# Altium PCB Pico_Main_Board.PcbDoc (part 2 of 2)
Units mil, origin at the board's own origin, x right, y up, seen from the top; angles counter-clockwise.
Board outline 4000 x 3000 mil, 2 copper layers (Top Layer, Bottom Layer); 8 components, 40 nets, 107 pads, 39 vias.
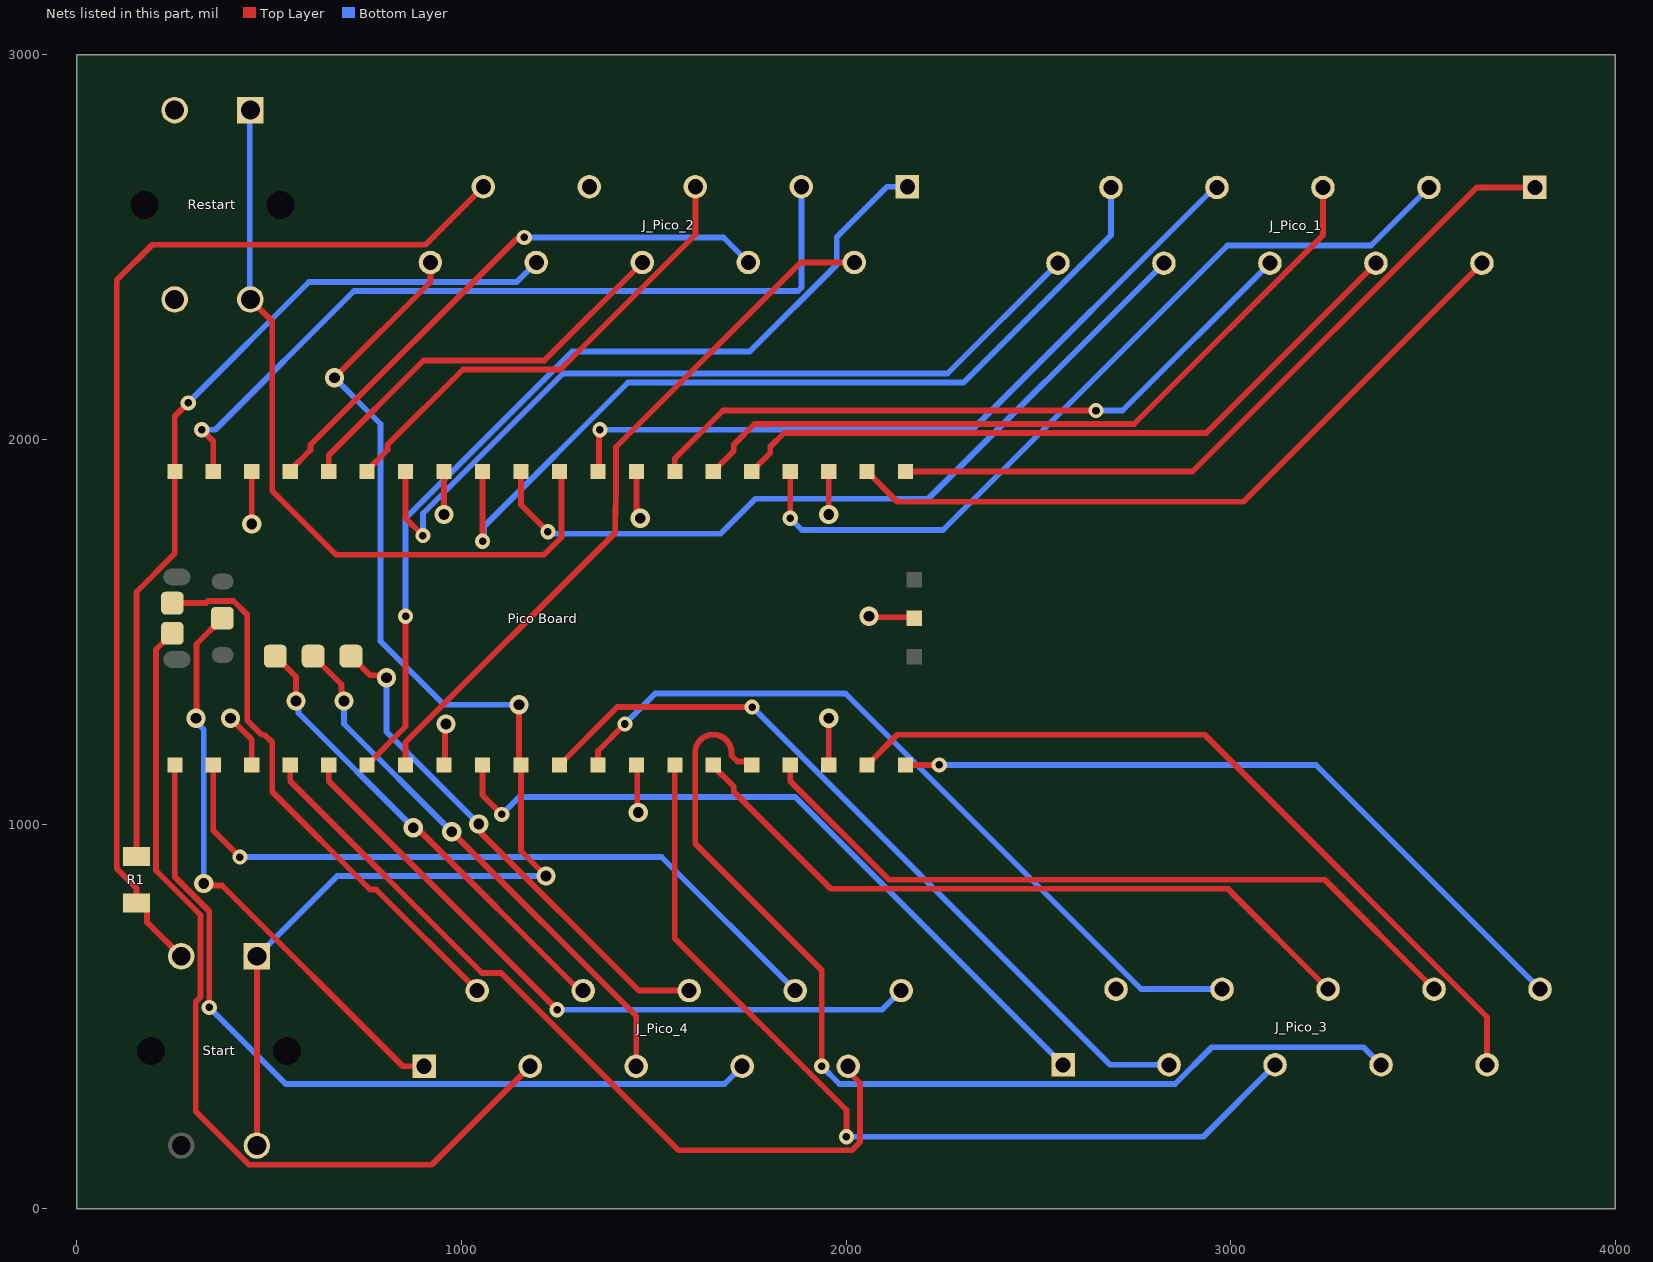
[diagram p2: the nets of this part, all layers, seen from the top]

## Part data
J_Pico_1 J_Pico_2 J_Pico_3 J_Pico_4: library part CMP-00298-00128517-1, "1985276 Barrier Strip Terminal Block, 2A, 1.5mm2, 1 Row(s), 1 Deck(s)", Ambient Temperature Range High=100°C, Color=Green, Current=2A, Flammability Rating="UL94 V-0", Max Supply Voltage=250V, Min Operating Temperature=-40°C, Voltage=300V, Approvals="UL, VDE", Contact Material=Tin, Contact Plating=Tin, Current Rating=2A, Depth=12mm, Height=13.1mm, Housing Color=Green, Housing Material=Polyamide, Insulation Material=Nylon, Lead Free="Lead Free", Length=12mm, Material=Nylon, Max Current Rating=2A, Max Operating Temperature=100°C, Mount="Through Hole", NexarPartId=128517, Number of Circuits=10, Number of Contacts=10, Number of Levels=1, Number of Pins=10, Number of Poles=10, Number of Positions=10, Number of Positions Per Level=10, Number of Rows=1, Packaging=Bulk, Pitch=3.5mm, Radiation Hardening=No, RoHS=Compliant, Stripping Length=8mm, Termination=Solder, Voltage Rating=250V, Weight=4.93001g, Width=36.5mm, Wire Gauge (Max)=20AWG, Wire Gauge (Min)=20AWG, Wire/Cable Gauge=16AWG
"Pico Board": "RP2040 Raspberry Pi Pico series ARMÂ® CortexÂ®-M0+ MCU 32-Bit Embedded Evaluation Board", Package=None, Availability="In Stock", Check_prices=https://www.snapeda.com/parts/SC0915/Raspberry+Pi/view-part/?ref=eda, MF="Raspberry Pi", MP=SC0915, Price=None, Purchase-URL=https://pricing.snapeda.com/search/part/SC0915/?ref=eda, SnapEDA_Link=https://www.snapeda.com/parts/SC0915/Raspberry+Pi/view-part/?ref=snap
R1: library part CMP-1014-00623-2, "Chip Resistor, 10 KOhm, +/- 1%, 0.25 W, -55 to 155 degC, 1206 (3216 Metric), RoHS, Tape and Reel", Case Code (Imperial)=1206, Case Code (Metric)=3216, Manufacturer=Yageo, Max Operating Temperature=155degC, Min Operating Temperature=-55degC, Package Description="2-Pin Surface Mount Device, Body 3.1 x 1.6 mm", Package Quantity=5000, Package Reference=1206.0, Power Rating=250mW, Resistance=10KOhm, Temperature Coefficient=100ppm/degreesC, Tolerance=1%, Voltage Rating=200V, Case/Package=1206, Composition=ThickFilm, Datasheet URL=http://www.yageo.com/NewPortal/yageodocoutput?fileName=/pdf/R-Chip/PYu-RC_Group_51_RoHS_L_5.pdf, Datasheet Version="Rev. 5, 10/2016", Depth=1.6mm, Height=0.55mm, Lead Free=LeadFree, Length=3.1mm, Manufacturer URL=http://www.yageo.com/, Military Standard=Not, Packaging=TapeandReel, REACH SVHC=Unknown, RoHSCompliant=true, Termination=SMD/SMT, Width=1.6mm
Restart Start: library part CMP-2000-05902-1, "Tactile Switch, 1 to 50 mA, 100 mOhm Max, 5 to 24 VDC, -25 to 70 degC, 4-Pin THD, RoHS, Bulk", Actuator Color=Orange, Contact Rating @ Voltage=0.05@24VDCA, Dielectric Strength=500VAC, Manufacturer=OmronElectronics, Maximum AC Voltage Rating=N/A, Maximum Contact Resistance=100mOhm, Maximum DC Voltage Rating=24V, Minimum Insulation Resistance=100MOhm, Operating Force=2.55N, Operating Temperature=-25to70C, Package Description="4-Pin Through Hole Device, Body 12 x 12 mm", Actuator Length=3mm, Actuator Style=ProjectedPlunger, Base Material=N/A, Body Orientation=Straight, Contact Material=N/A, Contact Plating=Gold, Datasheet URL=https://datasheet.ciiva.com/20148/78-0136-20148640.pdf, Datasheet Version=06/2009, Dimension=12x12x7.3mm, Electrical Life=1000000Cycles, Family=B3F, Ground Terminal=No, Housing Material=N/A, Illumination Type=N/R, Manufacturer URL=http://www.omron.com/, Mechanical Life=N/A, Mounting=ThroughHole,PCPins, Mounting Technology=ThroughHole, Package Reference=B3F-4055, Packaging=Bag, Part No=B3F-4055, Pole Throw Configuration=SPST, Product Weight=0.85g, RoHS=Yes, Seal Description=N/A, Seal Location=N/A, Switch Configuration=N.O., Type=Miniature

## Via types
v1: diameter 50, hole 28, Top Layer to Bottom Layer, 20 vias
v2: diameter 39.37, hole 19.68, Top Layer to Bottom Layer, 19 vias

## Nets (pads, with @x,y where several pads share a name; then routed paths per layer and width w, separated by ;. In a path a pad name is that pad's centre, name@x,y a point inside that pad or via, vN(x,y) a via of type N, cw(c..) or ccw(c..) an arc to the next point about the centre after c; other vN are vias at no path point)
3v3: "Pico Board.36" J_Pico_2.6 | length 1065.4
  Top Layer w15: 655,1916.5 655,1958.68 901.26,2204.94 1215.53,2204.94 J_Pico_2.6@1470.59,2460
AVREF: "Pico Board.35" J_Pico_2.5 | length 1242.4
  Top Layer w15: 755,1916.5 755,1919.68 808,1972.69 808,1985.91 1004.03,2181.94 1257.6,2181.94 1608.39,2532.73 J_Pico_2.5@1608.39,2656.85
EN: "Pico Board.37" J_Pico_2.4 | length 1479.8
  Top Layer w15: 555,1916.5 555,1919.68 608,1972.69 608,1985.91 1142.43,2520.34 1158.84,2520.34 v2(1163.5,2525)
  Bottom Layer w15: v2(1163.5,2525) 1681.18,2525 J_Pico_2.4@1746.18,2460
flag_1: "Pico Board.11" J_Pico_3.3 | length 2032.7
  Top Layer w15: 1255,1153.5 1405.5,1304 v2(1756,1304)
  Bottom Layer w15: v2(1756,1304) 2686.18,373.82 J_Pico_3.3@2840.04,373.82
flag_2: "Pico Board.12" J_Pico_3.4 | length 2039.5
  Top Layer w15: 1355,1153.5 1355,1190 v2(1425,1260)
  Bottom Layer w15: v2(1425,1260) 1504.19,1339.19 1998.8,1339.19 2767.31,570.67 J_Pico_3.4@2977.83,570.67
flag_3: "Pico Board.14" J_Pico_3.5 | length 2343.3
  Top Layer w15: 1555,1153.5 1555,702.24 2001,256.24 v2(2001,187)
  Bottom Layer w15: v2(2001,187) 2928.81,187 J_Pico_3.5@3115.63,373.82
flag_4: "Pico Board.15" J_Pico_3.6 | length 1849.5
  Top Layer w15: 1655,1153.5 1655,1150.32 1708,1097.31 1708,1084.09 1960.31,831.78 2992.31,831.78 J_Pico_3.6@3253.43,570.67
flag_5: "Pico Board.16" J_Pico_3.7 | length 2702.1
  Top Layer w15: 1608.19,1193.18 1608,1191.42 1608,948.51 1937,619.51 v2(1937,370) ; 1608.2,1193.23 1609.3,1197.25 1609.59,1198.19 1609.91,1199.19 1610.54,1201.04 1611.42,1203.19 ; 1611.43,1203.21 1612.23,1205.13 1613.08,1207.09 1614.45,1209.47 1615.01,1210.47 1616.1,1212.22 1617.22,1213.7 1626.31,1222.8 1627.8,1223.91 1630.99,1225.75 1632.28,1226.47 1634.82,1227.74 1635.45,1228.01 1636.89,1228.61 1639.6,1229.72 1641.59,1230.38 1644.84,1231.39 1646.83,1231.81 1648.58,1232 1661.46,1232 1663.23,1231.8 1666.22,1231.03 1666.81,1230.84 1669.22,1230.06 1669.65,1229.92 1671.06,1229.44 1673.23,1228.56 1675.12,1227.78 1677.08,1226.92 1679.47,1225.55 1680.47,1224.99 1682.22,1223.9 1683.7,1222.78 1692.78,1213.7 1693.93,1212.18 1696.34,1207.91 1697.65,1205.32 1697.78,1205.06 1697.97,1204.63 1698.61,1203.02 1699.58,1200.56 1700.08,1199.08 1701.39,1195.18 1701.8,1193.23 1702,1191.42 1702,1178.15 1717.65,1162.5 1746,1162.5 1755,1153.5
  Bottom Layer w15: v2(1937,370) 1983.01,323.99 2855.28,323.99 2951.12,419.83 3345.21,419.83 J_Pico_3.7@3391.22,373.82
flag_6: "Pico Board.17" J_Pico_3.8 | length 1940.1
  Top Layer w15: 1855,1153.5 1855,1111.32 2111.54,854.78 3244.9,854.78 J_Pico_3.8@3529.02,570.67
flag_7: "Pico Board.19" J_Pico_3.9 | length 2072.5
  Top Layer w15: 2055,1153.5 2133.49,1232 2932.76,1232 3666.81,497.94 J_Pico_3.9@3666.81,373.82
flag_8: "Pico Board.20" J_Pico_3.10 | length 1891
  Top Layer w15: 2155,1153.5 v2(2242.5,1153.5)
  Bottom Layer w15: v2(2242.5,1153.5) 3221.77,1153.5 J_Pico_3.10@3804.61,570.67
GND: "Pico Board.3" "Pico Board.8" "Pico Board.13" "Pico Board.18" "Pico Board.23" "Pico Board.28" "Pico Board.33" "Pico Board.38" "Pico Board.D2" J_Pico_2.7 J_Pico_3.2 Restart.3 Restart.4 | length 1104.6
  Top Layer w15: v1(400,1275) 455,1220 455,1153.5 ; v1(455,1780) 455,1916.5 ; 955,1153.5 957.5,1156 957.5,1257.5 v1(960,1260) ; v1(955,1805) 955,1916.5 ; 1455,1153.5 1457.5,1151 1457.5,1032.5 v1(1460,1030) ; 1455,1916.5 1455,1814.47 1465,1804.47 v1(1465,1795) ; 1955,1153.5 v1(1955,1275) ; v1(1955,1805) 1955,1916.5 ; v1(2060,1540) 2062.5,1537.5 2174.94,1537.5 2177.44,1535
key_column_1: "Pico Board.1" J_Pico_4.7 | length 2154.6
  Top Layer w15: 255,1153.5 255,862.72 344.52,773.2 v2(344.52,523)
  Bottom Layer w15: v2(344.52,523) 543.54,323.99 1683.99,323.99 J_Pico_4.7@1730,370
key_column_2: "Pico Board.2" J_Pico_4.8 | length 1855.7
  Top Layer w15: 355,1153.5 355,983 v2(424,914)
  Bottom Layer w15: v2(424,914) 1520.65,914 J_Pico_4.8@1867.8,566.85
key_column_3: "Pico Board.4" J_Pico_4.9 | length 2139.6
  Top Layer w15: 555,1153.5 555,1111.32 1053.46,612.86 1103.38,612.86 1564.43,151.81 2015.57,151.81 2036.19,172.43 2036.19,326.95 2005.59,357.55 J_Pico_4.9@2005.59,370
key_column_4: "Pico Board.5" J_Pico_4.10 | length 1797.6
  Top Layer w15: 655,1153.5 655,1111 v2(1249,517)
  Bottom Layer w15: v2(1249,517) 2093.54,517 J_Pico_4.10@2143.39,566.85
key_column_5: "Pico Board.9" J_Pico_3.1 | length 1916.1
  Top Layer w15: 1055,1153.5 1055,1075 v2(1105,1025)
  Bottom Layer w15: v2(1105,1025) 1150.5,1070.5 1867.77,1070.5 J_Pico_3.1@2564.45,373.82
kill_row_1: "Pico Board.34" J_Pico_1.10 | length 2163
  Top Layer w15: 855,1916.5 855,1795 v2(900,1750)
  Bottom Layer w15: v2(900,1750) 900,1807.28 1263.97,2171.24 2264.12,2171.24 J_Pico_1.10@2551.02,2458.15
kill_row_2: "Pico Board.31" J_Pico_1.8 | length 2080.8
  Top Layer w15: 1155,1916.5 1155,1830 v2(1225,1760)
  Bottom Layer w15: v2(1225,1760) 1231.59,1760 1237.09,1754.5 1673.8,1754.5 1764.8,1845.5 2213.96,1845.5 J_Pico_1.8@2826.61,2458.15
kill_row_3: "Pico Board.27" J_Pico_1.6 | length 1791.2
  Top Layer w15: 1555,1916.5 1555,1950 1680,2075 v2(2650,2075)
  Bottom Layer w15: v2(2650,2075) 2719.05,2075 J_Pico_1.6@3102.2,2458.15
kill_row_4: "Pico Board.25" J_Pico_1.4 | length 1856.8
  Top Layer w15: 1755,1916.5 1803.05,1964.54 1803.05,1980.95 1838.91,2016.81 2936.46,2016.81 J_Pico_1.4@3377.8,2458.15
kill_row_5: "Pico Board.22" J_Pico_1.2 | length 1887.8
  Top Layer w15: 2055,1916.5 2133.49,1838 3033.24,1838 J_Pico_1.2@3653.39,2458.15
move_row_1: "Pico Board.32" J_Pico_1.9 | length 2289.5
  Top Layer w15: v2(1055,1735) 1055,1916.5
  Bottom Layer w15: v2(1055,1735) 1059.66,1739.66 1059.66,1774.42 1433.49,2148.24 2306.19,2148.24 2688.82,2530.87 J_Pico_1.9@2688.82,2655
move_row_2: "Pico Board.29" J_Pico_1.7 | length 1975.9
  Top Layer w15: 1355,1916.5 1357.5,1919 1357.5,2022.5 v2(1360,2025)
  Bottom Layer w15: v2(1360,2025) 2328.39,2025 2958.39,2655 J_Pico_1.7@2964.41,2655
move_row_3: "Pico Board.26" J_Pico_1.5 | length 1973.2
  Top Layer w15: 1655,1916.5 1708,1969.5 1708,1985.91 1761.91,2039.81 2748.94,2039.81 3240,2530.88 J_Pico_1.5@3240,2655
move_row_4: "Pico Board.24" J_Pico_1.3 | length 2163.6
  Top Layer w15: v2(1855,1795) 1855,1916.5
  Bottom Layer w15: v2(1855,1795) 1885.5,1764.5 2252.37,1764.5 2992.03,2504.16 3364.75,2504.16 J_Pico_1.3@3515.59,2655
move_row_5: "Pico Board.21" J_Pico_1.1 | length 1942.1
  Top Layer w15: 2155,1916.5 2901.21,1916.5 3639.72,2655 J_Pico_1.1@3791.18,2655
NetJ_Pico_2_9: J_Pico_2.9 R1.2 Start.3 | length 2887.4
  Top Layer w15: Start.3@271.57,656.06 182.93,744.7 182.93,777.85 165.83,794.96 R1.2@155,794.96 155,833.08 104.07,884.01 104.07,2414.07 196.01,2506.01 906.37,2506.01 J_Pico_2.9@1057.2,2656.85
restart_button: "Pico Board.30" Restart.1 Restart.2 | length 2035.9
  Top Layer w15: Restart.2@451.26,2363.94 508,2307.19 508,1865.51 673.7,1699.81 1214.57,1699.81 1260.19,1745.43 1260.19,1911.31 1255,1916.5
  Bottom Layer w15: Restart.2@451.26,2363.94 450,2365.2 450,2860 451.26,2858.74 Restart.1@451.26,2856.06
SCL: "Pico Board.7" J_Pico_2.2 | length 1870.8
  Top Layer w15: 855,1153.5 855,1212.28 1400,1757.28 1400,1773.24 1402,1878.58 1402,1979.9 1882.1,2460 J_Pico_2.2@2021.77,2460
SDA: "Pico Board.6" J_Pico_2.1 | length 2386.6
  Top Layer w15: 755,1153.5 855,1253.5 v2(855,1540)
  Bottom Layer w15: v2(855,1540) 855,1794.8 1288.36,2228.16 1749.93,2228.16 1975.76,2453.99 1975.76,2526.06 2106.55,2656.85 J_Pico_2.1@2159.57,2656.85
start_button: "Pico Board.10" J_Pico_2.10 Start.1 Start.2 | length 3370.6
  Top Layer w15: Start.2@468.43,163.94 Start.1@468.43,656.06 ; v1(670,2160) 919.41,2409.41 J_Pico_2.10@919.41,2460 ; v1(1150,1310) 1150,1158.5 1155,1153.5 1155,930 v1(1220,865)
  Bottom Layer w15: Start.1@468.43,656.06 677.36,865 v1(1220,865) ; v1(670,2160) 790,2040 790,1475 955,1310 v1(1150,1310)
TP1: "Pico Board.TP1" J_Pico_4.1 | length 1496.5
  Top Layer w15: v1(310,1275) 311.05,1276.05 311.05,1467.82 378.23,1535 ; v1(330,845) 335.16,839.84 377.5,839.84 847.34,370 J_Pico_4.1@903.23,370
  Bottom Layer w15: v1(310,1275) 310,1265.53 330,1245.53 v1(330,845)
TP2: "Pico Board.TP2" J_Pico_4.2 | length 1450.1
  Top Layer w15: 248.31,1574.37 335.8,1574.37 341.46,1580.03 407.26,1580.03 443.02,1544.26 443.02,1269.22 478.79,1233.46 485.44,1232 489.09,1230.5 490.29,1230 508,1212.3 508,1084.09 762.22,829.87 778,829.87 J_Pico_4.2@1041.02,566.85
TP3: "Pico Board.TP3" J_Pico_4.3 | length 2346.2
  Top Layer w15: 248.31,1495.63 206.33,1453.65 206.33,878.87 321.52,763.67 321.52,549.76 309.34,537.57 309.34,252.39 447.74,113.99 922.81,113.99 J_Pico_4.3@1178.82,370
TP4: "Pico Board.TP4" J_Pico_4.4 | length 1212.2
  Top Layer w15: 516.02,1436.57 570,1382.6 v1(570,1320) ; v1(875,990) 884.23,990 1307.38,566.85 J_Pico_4.4@1316.61,566.85
  Bottom Layer w15: v1(570,1320) 576.7,1313.3 576.7,1288.3 v1(875,990)
TP5: "Pico Board.TP5" J_Pico_4.5 | length 1414.5
  Top Layer w15: 614.45,1436.57 688.3,1362.72 688.3,1326.7 v1(695,1320) ; v1(975,980) 1454.41,500.59 J_Pico_4.5@1454.41,370
  Bottom Layer w15: v1(695,1320) 695,1260 v1(975,980)
TP6: "Pico Board.TP6" J_Pico_4.6 | length 1331.7
  Top Layer w15: 712.87,1436.57 762.75,1386.7 798.3,1386.7 v1(805,1380) ; v1(1045,1000) 1051.7,993.3 1051.7,976.03 1460.87,566.85 J_Pico_4.6@1592.2,566.85
  Bottom Layer w15: v1(805,1380) 805,1240 v1(1045,1000)
VCC: "Pico Board.40" J_Pico_2.8 R1.1 | length 2292.1
  Top Layer w15: R1.1@155,915.04 155,1603.49 255,1703.49 255,2060 v2(290,2095)
  Bottom Layer w15: v2(290,2095) 603.94,2408.94 1143.94,2408.94 J_Pico_2.8@1195,2460
VSYS: "Pico Board.39" J_Pico_2.3 | length 2095.2
  Top Layer w15: v2(325,2025) 355,1995 355,1916.5
  Bottom Layer w15: v2(325,2025) 360,2025 720.94,2385.94 1875.19,2385.94 1883.98,2394.73 J_Pico_2.3@1883.98,2656.85
pads on no net: "Pico Board.A" "Pico Board.B" "Pico Board.C" "Pico Board.D1" "Pico Board.D3" "Pico Board.D" Restart.MH1 Restart.MH2 Start.4 Start.MH1 Start.MH2

## Polygon pours and split planes (outlines as drawn)
GND on Bottom Layer "GND_L02_P000" (solid, remove dead copper, pour order 0): 0,3000 4000,3000 4000,0 0,0

## Keep-outs
Keep-Out Layer:
  the board outline again, w10